# Altium PCB SafeCar.PcbDoc
Units mil, origin at the board's own origin, x right, y up, seen from the top; angles counter-clockwise.
Board outline 13860 x 8880 mil, 2 copper layers (Top Layer, Bottom Layer); 28 components, 48 nets, 169 pads, 73 vias.
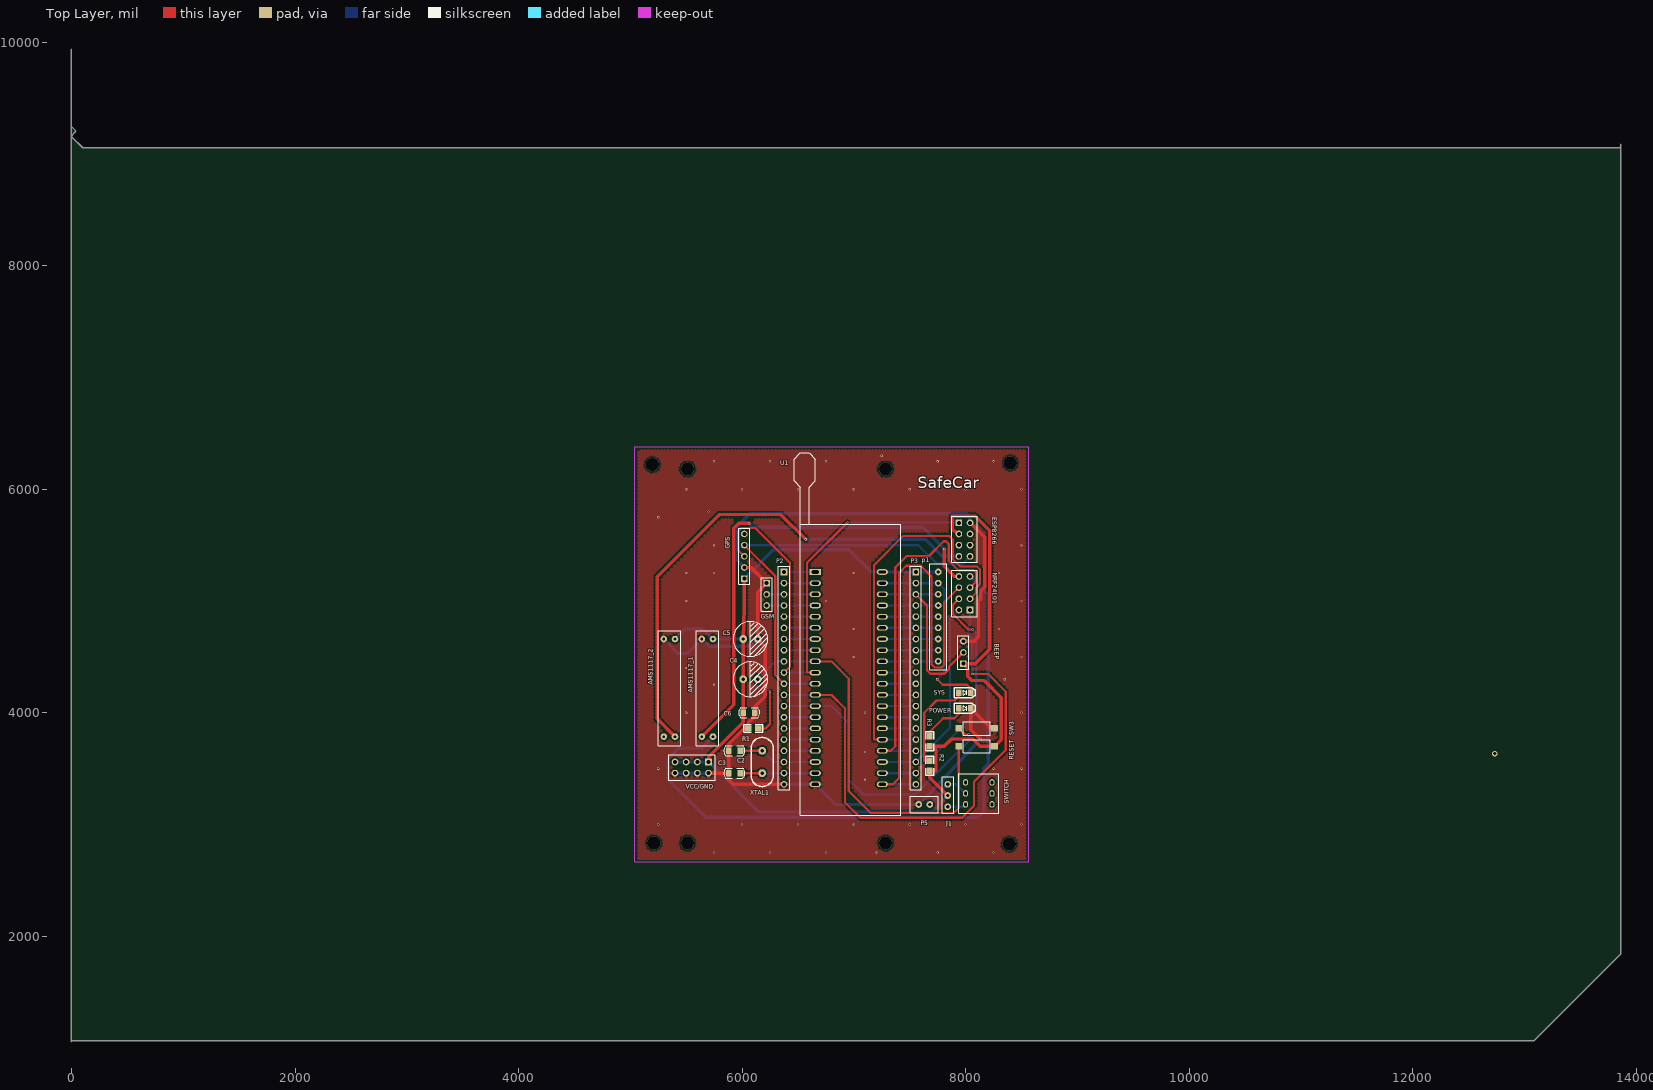
[diagram p0: Top Layer view]
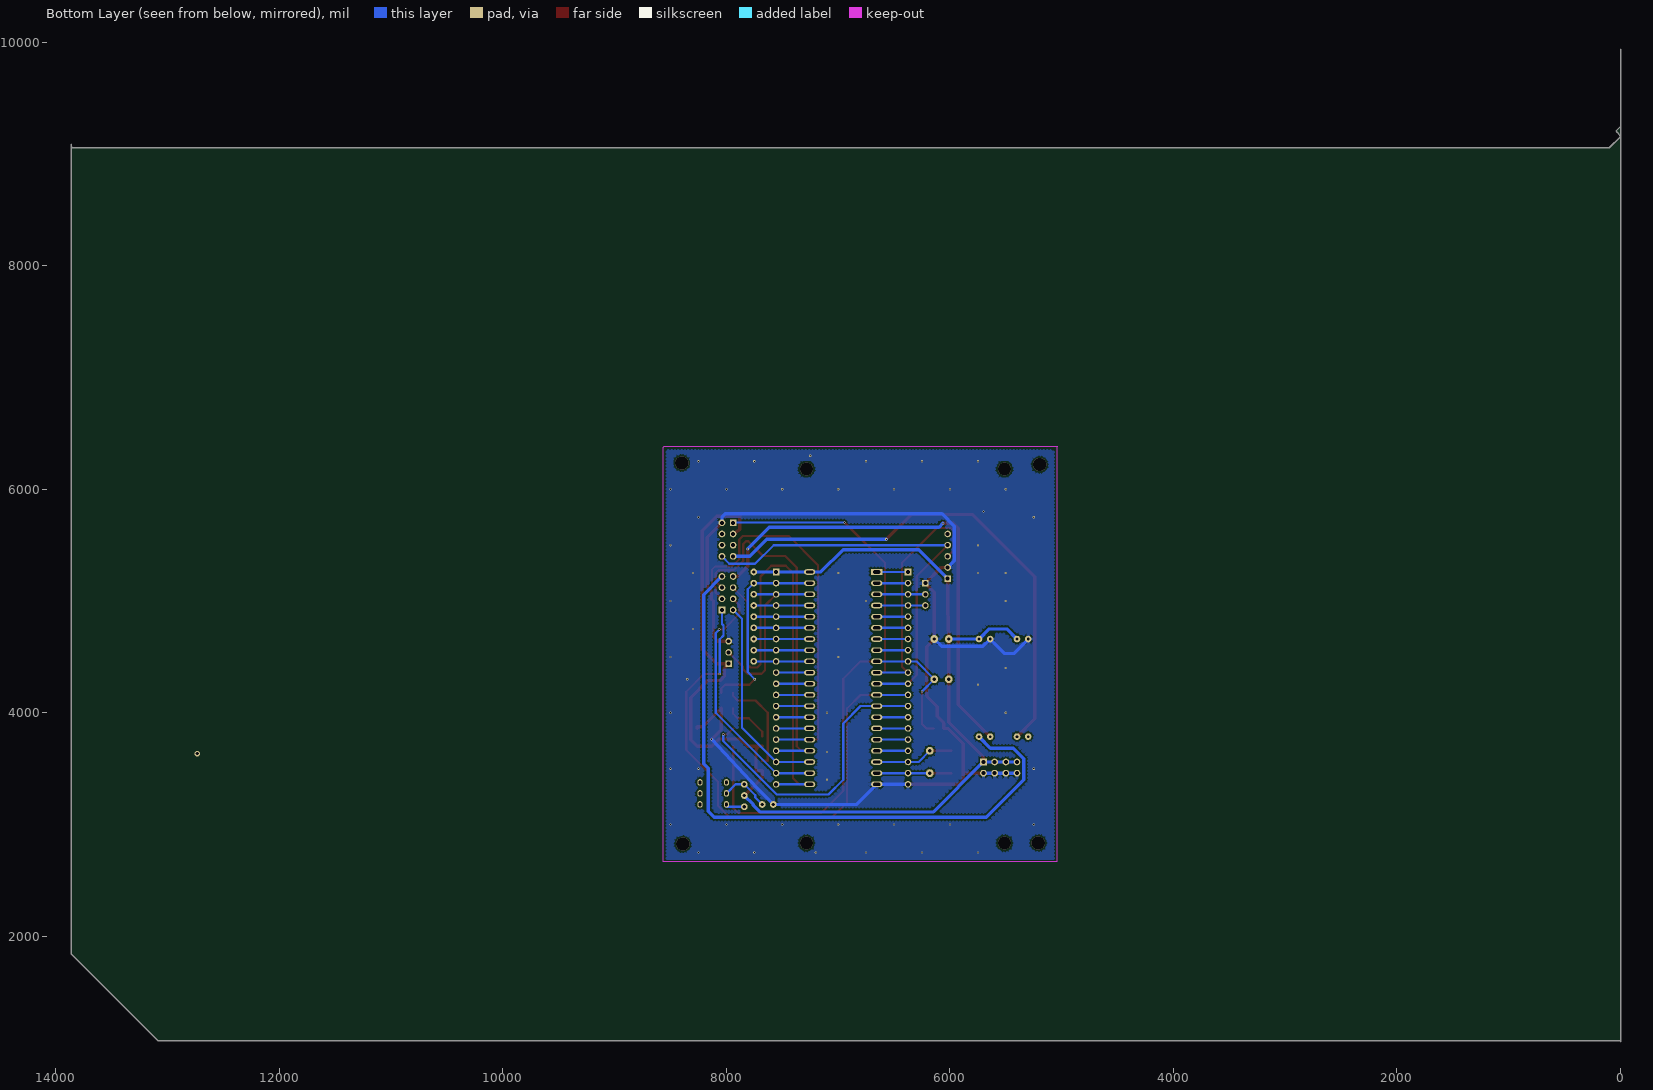
[diagram p1: Bottom Layer view, seen from below]

## Layer stack, top to bottom
Top Layer: signal copper 1.4
Dielectric: dielectric 12.6, FR-4, Dk 4.8
Bottom Layer: signal copper 1.4

## Board outline
0,9155 100,9055 13850,9055 13860,9065 13860,9085 13860,1840 13085,1065 0,1065 0,1055 0,9935 0,9245 40,9205 30,9195

## Design rules (kind name [scope] priority, off if disabled: settings)
Clearance [All] p1: gap=15
ComponentClearance [All] p1: gap=15 collisioncheckmode=3 verticalgap=10 showdistances=FALSE
HoleSize [All] p1: absolutevalues=TRUE maxlimit=200 minlimit=1 maxpercent=80.000 minpercent=20.000
PlaneConnect [All] p1: planeconnectstyle=Relief reliefexpansion=20 reliefentries=4 reliefconductorwidth=30 reliefairgap=15
PolygonConnect VIA [ISVIA] p1: connectstyle=Direct reliefconductorwidth=10 reliefentries=4 polygonreliefangle="90 Angle"
PolygonConnect [All] p2: connectstyle=Relief reliefconductorwidth=30 reliefentries=4 polygonreliefangle="90 Angle"
RoutingVias [All] p1: holewidth=10 width=20 viastyle="Through Hole" minholewidth=10 minwidth=20 maxholewidth=10 maxwidth=20
SilkscreenOverComponentPads [All] p1: minsilkscreentomaskgap=0
SolderMaskExpansion [All] p1: expansion=4
Width Width_GND [InNet('GND')] p1: maxlimit=30 minlimit=30 preferedwidth=30
Width Width_VCC [InNet('VCC')] p2: maxlimit=30 minlimit=30 preferedwidth=30
Width Width_3.3_2 [InNet('3.3_2')] p3: maxlimit=30 minlimit=30 preferedwidth=30
Width Width_3.3_1 [InNet('3.3_1')] p4: maxlimit=30 minlimit=30 preferedwidth=30
Width Width_GND2 [InNet('GND_2')] p5: maxlimit=30 minlimit=30 preferedwidth=30
Width Width_GND1 [InNet('GND_1')] p6: maxlimit=30 minlimit=30 preferedwidth=30
Width [All] p7: maxlimit=20 minlimit=20 preferedwidth=20
24 further rules are at their usual default settings.

## Components (designator, comment, footprint, x,y, rotation, side; value= is the part's Value field where it differs from the comment)
AMS1117_1 "AMS1117" AMS1117 5740,4660 r270 top
AMS1117_2 "AMS1117" AMS1117 5400,4660 r270 top
BEEP "Header 3" HDR1X3 7980,4440 r90 top
C2 "22" 0805C 5880,3660 r0 top
C3 "22" 0805C 5880,3460 r0 top
C4 "CAPD" RB470U 6075,4300 r0 top
C5 "CAPD" RB470U 6075,4660 r0 top
C6 "22" 0805C 6115,4000 r180 top
ESP8266 "Header 4X2H" HDR2X4H 7940,5700 r270 top
GPS "Header 5" HDR1X5 6020,5200 r90 top
GSM "Header 3" HDR1X3 6220,5160 r270 top
J1 "Select" CON3 7840,3160 r90 top
NRF24L01 "Header 4X2H" HDR2X4H 8040,4920 r90 top
p1 "PAIZU_9" PAIZU_9 7755,5260 r0 top
P2 "Header 20" HDR1X20 6375,5260 r270 top
P3 "Header 20" HDR1X20 7555,5260 r270 top
P5 "con2" CON2 7580,3180 r90 top
POWER "LED" 0805-LED 7940,4040 r180 top (schematic designator LED2)
R1 "10k" 0805 6055,3860 r0 top
R2 "390" 0805 7680,3480 r90 top
R3 "390" 0805 7680,3700 r90 top
RESET "SW" SWD 7940,3700 r0 top (schematic designator SW1)
SW3 "SW" SWD 7940,3860 r0 top
SWITCH "SWITCH3" SWITCH3 8000,3180 r90 top (schematic designator SW2)
SYS "LED" 0805-LED 7940,4180 r180 top (schematic designator LED1)
U1 "AT89C51" DIP40紧锁座 6655,5260 r0 top
VCC/GND "Header 4X2H" HDR2X4H 5700,3560 r180 top
XTAL1 "CRYSTAL" XTAL 6180,3560 r90 top

## Footprints (in the part's own frame and the unit in brackets; to place one, negate y for a bottom-side part, rotate by r counter-clockwise, add the part's x,y. Pads: shape width x height; smd on the part's side, far side on the other; paste and mask are expansions set on the pad)
0805 [mil]
  rect 60x50 smd: 1(0,0) 2(90,0)
  silkscreen extent -40,-35 130,35
0805-LED [mm]
  rect 1.2x1.5 smd: 1(0,0) 2(-2.686,0)
  silkscreen extent -3.76,-1.14 1.07,1.14
0805C [mil]
  rect 50x60 smd: 1(0,0) 2(105.71,-0.31)
  silkscreen extent -43,-45 146,45
AMS1117 [mm]
  round 1.5 hole 0.6: 1(0,0) 2(0,-2.54) 3(22.18,0) 4(22.18,-2.54)
  silkscreen extent -1.91,-3.81 24.26,1.27
CON2 [mil]
  round 60 hole 30: 1(0,0) 2(0,-100)
  silkscreen extent -75,-175 75,75
CON3 [mil]
  round 60 hole 30: 1(-0.51,0.35) 2(99.49,0.35) 3(200,0)
  silkscreen extent -61,-53 269,47
DIP40紧锁座 [mil]
  rect 100x50 hole 30 slot 62.99 at 0 deg: 1(0,0)
  oval 100x50 hole 25 slot 62.99 at 0 deg: 2(0,-100) 3(0,-200) 4(0,-300) 5(0,-400) 6(0,-500) 7(0,-600) 8(0,-700) 9(0,-800) 10(0,-900) 11(0,-1000) 12(0,-1100) 13(0,-1200) 14(0,-1300) 15(0,-1400) 16(0,-1500) 17(0,-1600) 18(0,-1700) 19(0,-1800) 20(0,-1900) 21(600,-1900) 22(600,-1800) 23(600,-1700) 24(600,-1600) 25(600,-1500) 26(600,-1400) 27(600,-1300) 28(600,-1200) 29(600,-1100) 30(600,-1000) 31(600,-900) 32(600,-800) 33(600,-700) 34(600,-600) 35(600,-500) 36(600,-400) 37(600,-300) 38(600,-200) 39(600,-100) 40(600,0)
  silkscreen extent -190,-2175 765,1065
HDR1X3 [mm] "Connector; Header; 3 Position"
  rect 1.5x1.5 hole 0.9: 1(0,0)
  round 1.5 hole 0.9: 2(2.54,0) 3(5.08,0)
  silkscreen extent -1.27,-1.27 6.35,1.27
HDR1X5 [mm] "Connector; Header; 5 Position"
  rect 1.5x1.5 hole 0.9: 1(0,0)
  round 1.5 hole 0.9: 2(2.54,0) 3(5.08,0) 4(7.62,0) 5(10.16,0)
  silkscreen extent -1.27,-1.27 11.43,1.27
HDR1X20 [mm] "Connector; Header; 20 Position"
  rect 1.5x1.5 hole 0.9: 1(0,0)
  round 1.5 hole 0.9: 2(2.54,0) 3(5.08,0) 4(7.62,0) 5(10.16,0) 6(12.7,0) 7(15.24,0) 8(17.78,0) 9(20.32,0) 10(22.86,0) 11(25.4,0) 12(27.94,0) 13(30.48,0) 14(33.02,0) 15(35.56,0) 16(38.1,0) 17(40.64,0) 18(43.18,0) 19(45.72,0) 20(48.26,0)
  silkscreen extent -1.27,-1.27 49.53,1.27
HDR2X4H [mil]
  rect 60x60 hole 35.43: 1(0,0)
  round 60 hole 35.43: 2(0,100) 3(100,0) 4(100,100) 5(200,0) 6(200,100) 7(300,0) 8(300,100)
  silkscreen extent -60,-65 355,165
PAIZU_9 [mil]
  round 60 hole 30: 1(0,0) 2(0,-100) 3(0,-200) 4(0,-300) 5(0,-400) 6(0,-500) 7(0,-600) 8(0,-700) 9(0,-800)
  silkscreen extent -75,-875 75,75
RB470U [mil]
  round 70 hole 30: 1(-65,0) 2(65,0)
  silkscreen extent -155,-155 155,155
SWD [mil]
  rect 60x60 smd: 1(-0.4,0.5) 2(319.6,0.5)
  silkscreen extent 40,-60 280,60
SWITCH3 [mm]
  oval 1.5x1.2 hole 0.5 slot 0.8 at 0 deg: 1(0,0) 2(2.5,0) 3(5,0) 4(5,-6) 5(2.5,-6) 6(0,-6)
  silkscreen extent -2,-7.5 7,1.5
XTAL [mil]
  round 70 hole 30: 1(-100,0) 2(100,0)
  silkscreen extent -220,-100 220,100

## Part data
BEEP GSM: "Header, 3-Pin"
C2 C3 C6: library part CAP, "C"
ESP8266 NRF24L01 VCC/GND: "Header, 4-Pin, Dual row, Right Angle"
GPS: "Header, 5-Pin"
J1: library part JUMP3
P2 P3: "Header, 20-Pin"
R1 R2 R3: library part R1, "R?"

## Via types
v1: diameter 20, hole 10, Top Layer to Bottom Layer, 63 vias
v2: diameter 118.11, hole 118.11, Top Layer to Bottom Layer, 8 vias
v3: diameter 50, hole 28, Top Layer to Bottom Layer, 2 vias

## Nets (pads, with @x,y where several pads share a name; then routed paths per layer and width w, separated by ;. In a path a pad name is that pad's centre, name@x,y a point inside that pad or via, vN(x,y) a via of type N, cw(c..) or ccw(c..) an arc to the next point about the centre after c; other vN are vias at no path point)
3.3_1: AMS1117_1.3 NRF24L01.7 | length 5841
  Bottom Layer w30: AMS1117_1.3 5637.23,3684 5435,3684 5340,3589 5340,3400 5675,3065 8109,3065 8164,3120 8164,3505 8204,3545 8204,5056 NRF24L01.7
3.3_2: AMS1117_2.3 ESP8266.7 | length 4583.3
  Top Layer w30: AMS1117_2.3 5240,3946.77 5240,5219 5795,5774 6347,5774 v1(6569,5552)
  Bottom Layer w30: v1(6569,5552) 7638,5552 7790,5400 ESP8266.7
ALE: P3.11 U1.30 | length 300
  Bottom Layer w20: U1.30 P3.11
EA: P3.10 U1.31 | length 300
  Bottom Layer w20: U1.31 P3.10
GND: AMS1117_1.2 AMS1117_2.2 BEEP.3 C2.1 C3.1 C5.2 C6.1 ESP8266.2 GPS.2 GSM.1 P2.20 P5.1 POWER.2 R1.1 SW3.2 U1.20 VCC/GND.2 VCC/GND.4 VCC/GND.6 VCC/GND.8 | length 10755.5
  Top Layer w30: VCC/GND.2 C3.1 ; GPS.2 6080,5300 GSM.1 6140,5080 C5.2 6209,4591 6209,4150 6115,4056 C6.1 6115,3969 6055,3909 R1.1 6018,3860 5880,3722 C2.1 C3.1 ; P2.20 5920,3360 5880,3400 C3.1 ; BEEP.3 8076.16,4640 8115,4678.84 8115,4997.68 8135,5017.68 8135,5090 8170,5125 8170,5570 ESP8266.2 ; v1(8133,3763) 8045.75,3850.25 POWER.2 8210.25,3875.5 8259.6,3875.5 SW3.2
  Bottom Layer w30: AMS1117_2.2 5430,4530 5510,4530 AMS1117_1.2 5705,4595 6075,4595 C5.2 ; VCC/GND.8 VCC/GND.6 VCC/GND.4 VCC/GND.2 ; GPS.2 5960,5360 5960,5669.49 6070.51,5780 8010,5780 8040,5750 ESP8266.2 ; P2.20 U1.20 6835,3180 P5.1 7723,3323 v1(8133,3763)
  other v1: 5750,2750 6250,2750 6750,2750 7200,2750 7750,2750 8250,2750 5250,3000 6000,3000 6500,3000 7000,3000 7500,3000 8000,3000 8500,3000 7100,3400 5250,3500 8250,3500 8500,3500 7100,3650 5500,4000 7100,4000 8500,4000 5750,4250 8350,4300 5500,4400 7000,4500 8500,4500 7000,4750 8300,4750 5500,5000 6750,5000 8500,5000 5500,5250 5750,5250 7000,5250 8300,5250 5750,5500 8500,5500 5250,5750 8250,5750 5700,5800 5500,6000 6000,6000 6500,6000 7000,6000 7500,6000 8000,6000 8500,6000 5750,6250 6250,6250 6750,6250 7750,6250 8250,6250 7250,6300
GND_1: AMS1117_1.4 NRF24L01.8 | length 4302.4
  Top Layer w30: AMS1117_1.4 5925.47,4072.24 5925.47,5650 5970,5694.53 v1(6063,5694.53) ; v1(7810,5466) 7810,5310 7900,5220 NRF24L01.8
  Bottom Layer w30: v1(6063,5694.53) 6097.53,5660 7616,5660 v1(7810,5466)
GND_2: AMS1117_2.4
NetJ1_1: J1.1 SWITCH.1 | length 180.9
  Bottom Layer w20: J1.1 8000,3159.49 SWITCH.1
NetJ1_3: J1.3 P5.2 SWITCH.2 | length 440.1
  Bottom Layer w20: P5.2 7742,3242 7742,3262 J1.3 7918.43,3360 SWITCH.2
NetLED1_1: R2.2 SYS.1 | length 882.1
  Top Layer w20: R2.2 7630,3570 7630,4000 7740,4110 7900,4110 7940,4150 SYS.1
NetLED2_1: POWER.1 R3.2 | length 416.3
  Top Layer w20: R3.2 7680,3831 7800,3951 7900,3951 7940,3991 POWER.1
P00/LED1: p1.2 P3.2 SYS.2 U1.39 | length 1780.9
  Top Layer w20: v1(7746,4300) 7795.73,4250.27 8013.27,4250.27 8045.75,4217.79 SYS.2
  Bottom Layer w20: U1.39 P3.2 p1.2 7810,5105 7810,4364 v1(7746,4300)
P01/BEEP: BEEP.2 p1.3 P3.3 U1.38 | length 1650.4
  Top Layer w20: P3.3 7655,4960 7655,4380 7685,4350 7812,4350 7852.25,4390.25 7852.25,4412.25 BEEP.2
  Bottom Layer w20: U1.38 P3.3 p1.3
P02: p1.4 P3.4 U1.37 | length 500
  Bottom Layer w20: U1.37 P3.4 p1.4
P03: p1.5 P3.5 U1.36 | length 500
  Bottom Layer w20: U1.36 P3.5 p1.5
P04: p1.6 P3.6 U1.35 | length 500
  Bottom Layer w20: U1.35 P3.6 p1.6
P05: p1.7 P3.7 U1.34 | length 500
  Bottom Layer w20: U1.34 P3.7 p1.7
P06: p1.8 P3.8 U1.33 | length 500
  Bottom Layer w20: U1.33 P3.8 p1.8
P07: p1.9 P3.9 U1.32 | length 500
  Bottom Layer w20: U1.32 P3.9 p1.9
P10: P2.1 U1.1 | length 280
  Bottom Layer w20: P2.1 U1.1
P11: P2.2 U1.2 | length 280
  Bottom Layer w20: P2.2 U1.2
P12/RXD: GSM.2 P2.3 U1.3 | length 435
  Bottom Layer w20: GSM.2 P2.3 U1.3
P13/TXD: GSM.3 P2.4 U1.4 | length 435
  Bottom Layer w20: GSM.3 P2.4 U1.4
P14: P2.5 U1.5 | length 280
  Bottom Layer w20: P2.5 U1.5
P15: P2.6 U1.6 | length 280
  Bottom Layer w20: P2.6 U1.6
P16: P2.7 U1.7 | length 280
  Bottom Layer w20: P2.7 U1.7
P17: P2.8 U1.8 | length 280
  Bottom Layer w20: P2.8 U1.8
P20/CE: NRF24L01.6 P3.20 U1.21 | length 4330.7
  Top Layer w20: U1.21 7350,3360 7405,3415 7405,5250 7470,5315 7600,5315 7696,5219 7696,4434 7725,4405 7785,4405 7810,4430 7810,4990 NRF24L01.6
  Bottom Layer w20: U1.21 P3.20
P21/SCK: NRF24L01.4 P3.19 U1.22 | length 2216.3
  Top Layer w20: NRF24L01.4 7885,4965 7885,4885 8025,4745 v1(8064,4745)
  Bottom Layer w20: U1.22 P3.19 8095,4000 8095,4714 v1(8064,4745)
P22/MISO: NRF24L01.2 P3.18 U1.23 | length 1819.5
  Bottom Layer w20: U1.23 P3.18 7861,3866 7861,4841 NRF24L01.2
P23/CSN: NRF24L01.5 P3.17 U1.24 | length 3212.3
  Top Layer w20: U1.24 7330,3660 7370,3700 7370,5300 7473,5403 7673,5403 7805,5535 7825,5535 7850,5510 7850,5360.5 7935.5,5275 8070,5275 8095,5250 8095,5175 NRF24L01.5
  Bottom Layer w20: U1.24 P3.17
P24/MOSI: NRF24L01.3 P3.16 U1.25 | length 3519.2
  Top Layer w20: U1.25 7180,3760 7180,5320 7443,5583 7852,5583 7885,5550 7885,5375 7950,5310 8100,5310 8130,5280 8130,5155.16 8095,5120.16 8095,5075 NRF24L01.3
  Bottom Layer w20: U1.25 P3.16
P25: P3.15 U1.26 | length 300
  Bottom Layer w20: U1.26 P3.15
P26: P3.14 U1.27 | length 300
  Bottom Layer w20: U1.27 P3.14
P27: P3.13 U1.28 | length 300
  Bottom Layer w20: U1.28 P3.13
P30/RXD: ESP8266.1 GPS.3 P2.10 U1.10 | length 4705.8
  Top Layer w20: GPS.3 5965.47,5454.53 5965.47,5625 5995,5654.53 6115.47,5654.53 6430,5340 6430,4415 P2.10 ; U1.10 6580,4360 6580,5340 v1(6943,5703)
  Bottom Layer w20: P2.10 U1.10 ; v1(6943,5703) 7940,5703 ESP8266.1
P31/TXD: ESP8266.8 GPS.4 P2.11 U1.11 | length 3783.1
  Top Layer w20: GPS.4 6297,5223 6297,4338 P2.11
  Bottom Layer w20: GPS.4 7577.28,5500 7743.28,5334 7974,5334 ESP8266.8 ; P2.11 U1.11
P32/INT0/IRQ: NRF24L01.1 P2.12 U1.12 | length 4789.4
  Top Layer w20: U1.12 6800,4160 6920,4040 6920,3200 7060,3060 7968,3060 8076,3168 8076,3383 8359.6,3666.6 8359.6,4188.99 8201.59,4347 v1(8060,4347)
  Bottom Layer w20: P2.12 U1.12 ; NRF24L01.1 8040,4793.58 8026.53,4780.11 8026.53,4692.51 8060,4659.05 v1(8060,4347)
P33/INT1/SW3: P2.13 SW3.1 U1.13 | length 2643.8
  Top Layer w20: SW3.1 7995.1,3805 v1(8028,3805)
  Bottom Layer w20: P2.13 U1.13 6800,4060 6955,3905 6955,3400 7086,3269 7550,3269 8028,3747 v1(8028,3805)
P34/T0: P2.14 U1.14 | length 280
  Bottom Layer w20: P2.14 U1.14
P35/T1: P2.15 U1.15 | length 280
  Bottom Layer w20: P2.15 U1.15
P36: P2.16 U1.16 | length 280
  Bottom Layer w20: P2.16 U1.16
P37: P2.17 U1.17 | length 280
  Bottom Layer w20: P2.17 U1.17
PSEN: P3.12 U1.29 | length 300
  Bottom Layer w20: U1.29 P3.12
RST: C4.2 P2.9 R1.2 RESET.1 U1.9 | length 4152.4
  Top Layer w20: R1.2 6209,3860 6249,3900 v1(6249,4191) ; U1.9 6800,4460 6955,4305 6955,3300 7151,3104 7895,3104 7939.6,3148.6 RESET.1
  Bottom Layer w20: v1(6249,4191) C4.2 6300,4460 P2.9 U1.9
VCC: AMS1117_1.1 AMS1117_2.1 BEEP.1 C4.1 C5.1 C6.2 ESP8266.3 GPS.1 J1.2 p1.1 P3.1 R2.1 R3.1 RESET.2 U1.40 VCC/GND.1 VCC/GND.3 VCC/GND.5 VCC/GND.7 | length 11172.1
  Top Layer w30: VCC/GND.1 5700,3605.71 6009.29,3915 C6.2 6009.29,4149 6010,4149.71 C4.1 C5.1 6020,4940 GPS.1 ; R3.1 7710,3700 ; J1.2 7680,3419.13 R2.1 7735,3480 7735,3675 7710,3700 ; ESP8266.3 7880,5640 7880,5760 8085,5760 8215,5630 8215,4570 8085,4440 BEEP.1 8020,4400 8020,4325 8056,4289 8165,4289 8319.6,4134.4 8319.6,3760.5 RESET.2 8131.5,3700.5 8067,3765 7874,3765 7809,3700 7710,3700
  Bottom Layer w30: VCC/GND.7 VCC/GND.5 VCC/GND.3 VCC/GND.1 6147,3113 7700,3113 7760,3173 7760,3179.84 J1.2 ; AMS1117_2.1 5490,4750 5650,4750 AMS1117_1.1 C5.1 ; GPS.1 6280,5460 6955,5460 7155,5260 U1.40 P3.1 p1.1
XATL1: C3.2 P2.19 U1.19 XTAL1.1 | length 669.4
  Top Layer w20: C3.2 6082,3459.69 6082.31,3460 XTAL1.1
  Bottom Layer w20: XTAL1.1 P2.19 U1.19
XATL2: C2.2 P2.18 U1.18 XTAL1.2 | length 710.8
  Top Layer w20: C2.2 6082,3659.69 6082.31,3660 XTAL1.2
  Bottom Layer w20: XTAL1.2 6280,3560 P2.18 U1.18
pads on no net: ESP8266.4 ESP8266.5 ESP8266.6 GPS.5 SWITCH.3 SWITCH.4 SWITCH.5 SWITCH.6
copper on no net:
  other v2: 8390,2825 5210,2835 5511.81,2834.65 7283.46,2834.65 5511.81,6181.1 7283.46,6181.1 5196.85,6220.47 8400,6235
  other v3: 12735,3635 29920,17410

## Polygon pours and split planes (outlines as drawn)
GND on Bottom Layer "Top Layer-No Net" (hatched 90Degree grid 30 track 30, remove dead copper, pour order 1001): 4700,6500 4750,6550 9050,6550 9050,2550 8800,2300 4650,2300 4650,6500 4700,6550
GND on Top Layer "Top Layer-No Net" (hatched 90Degree grid 30 track 30, remove dead copper, pour order 1000): 4700,6550 4750,6500 8900,6500 8900,2400 8850,2350 4650,2350 4650,6450 4700,6500

## Keep-outs
Keep-Out Layer:
  lines w10: 5035,6380 8560,6380 8565,6375 8565,2665 5105,2665 5070,2665 5040,2665 5040,2685 5040,6380

## Silkscreen, mask and mechanical layers (free items; w line width, h text height)
Top Overlay:
  text "SafeCar" at 7570,6010 h100